# Altium PCB mainpcb.PcbDoc
Units mm, origin at the board's own origin, x right, y up, seen from the top; angles counter-clockwise.
Board outline 49.4 x 49.95 mm, 2 copper layers (Top Layer, Bottom Layer); 81 components, 58 nets, 258 pads, 66 vias.
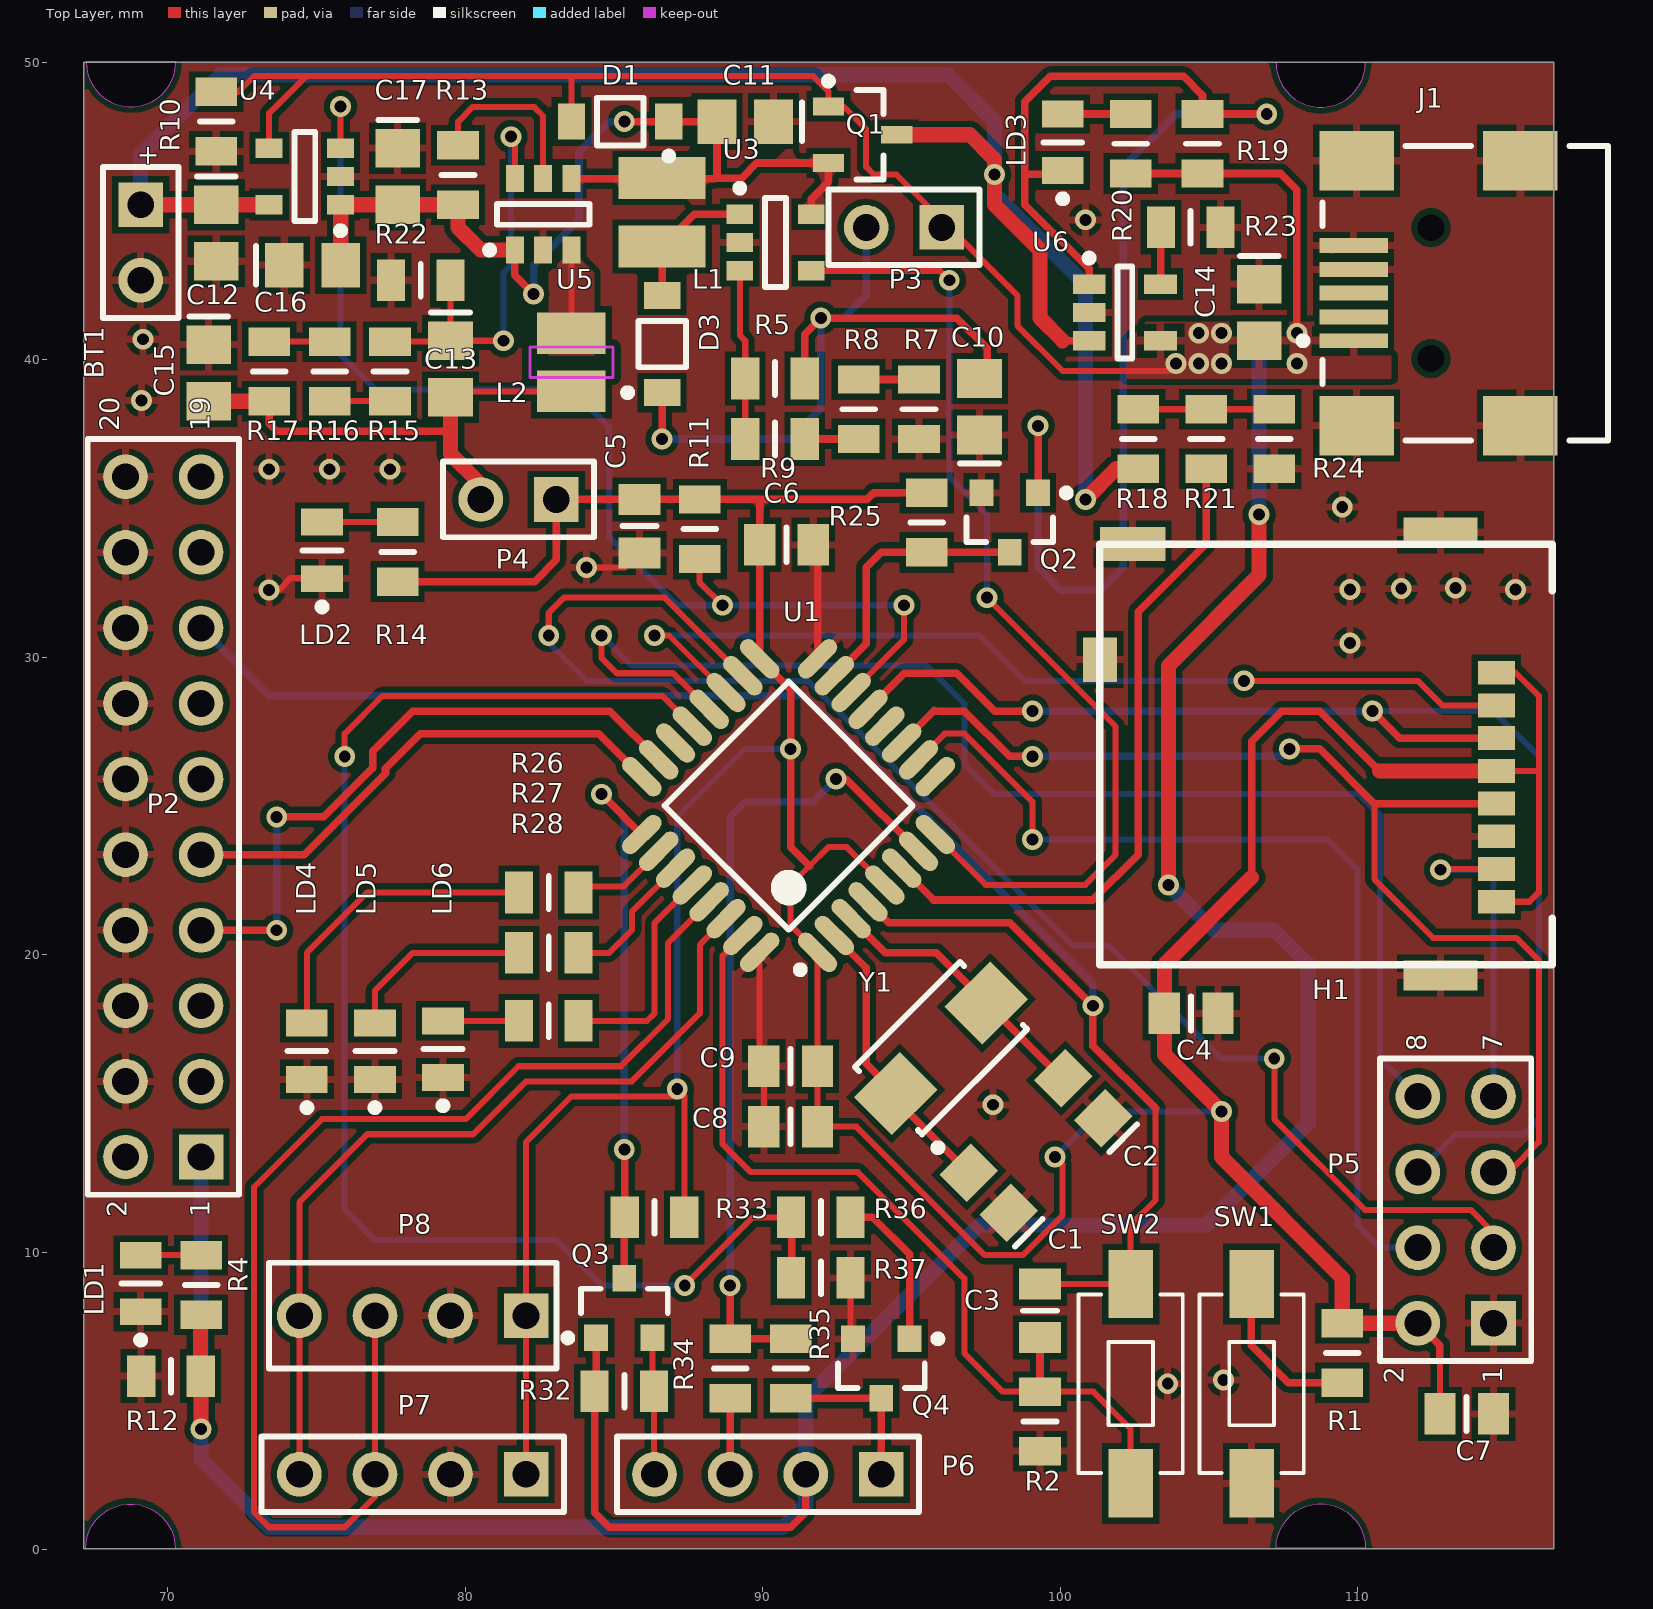
[diagram p0: Top Layer view]
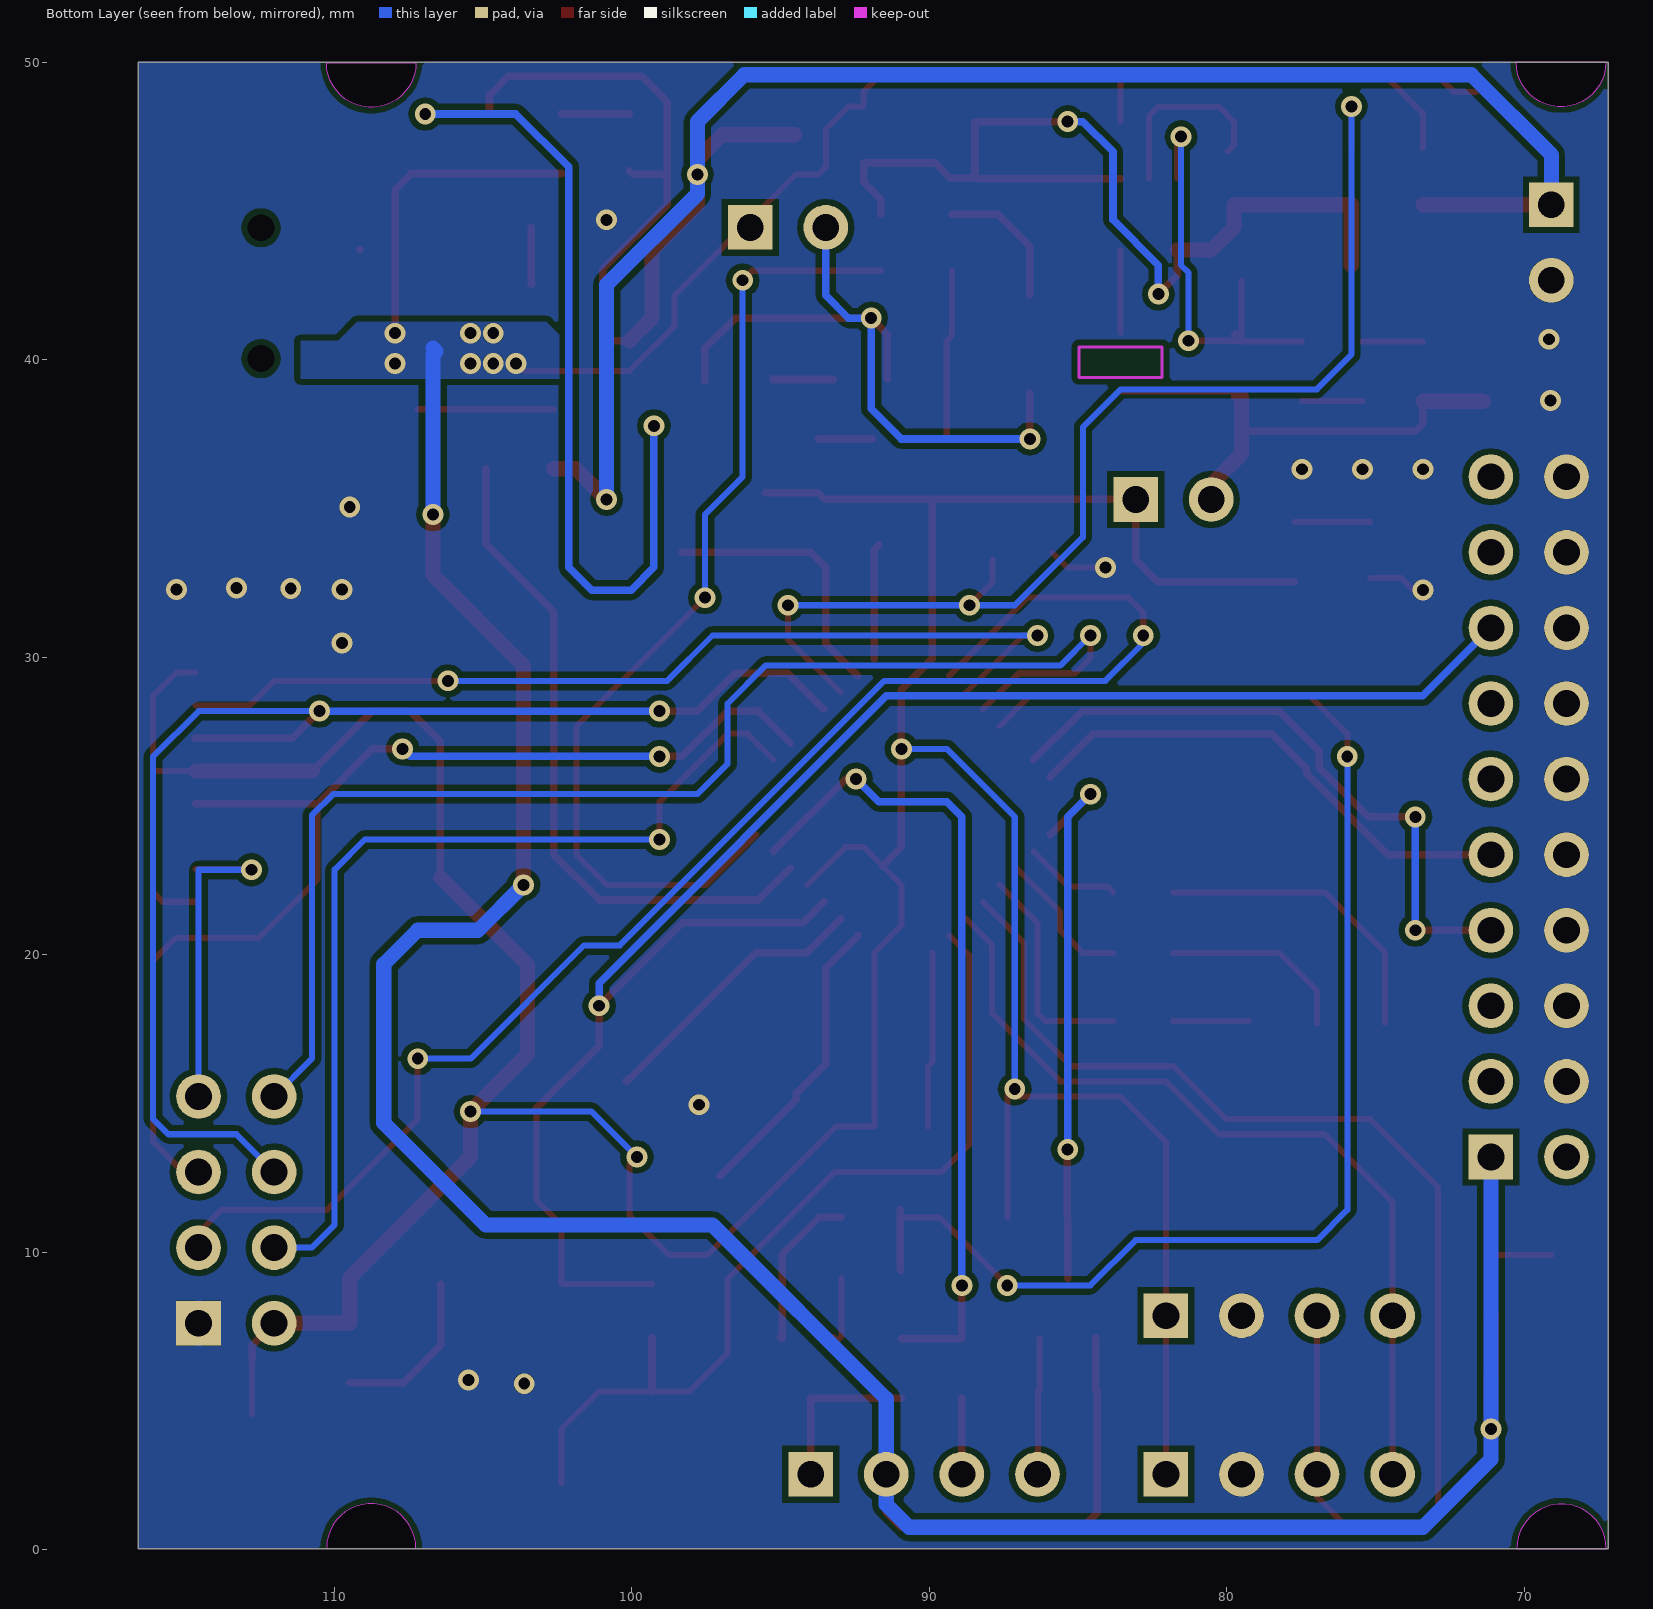
[diagram p1: Bottom Layer view, seen from below]
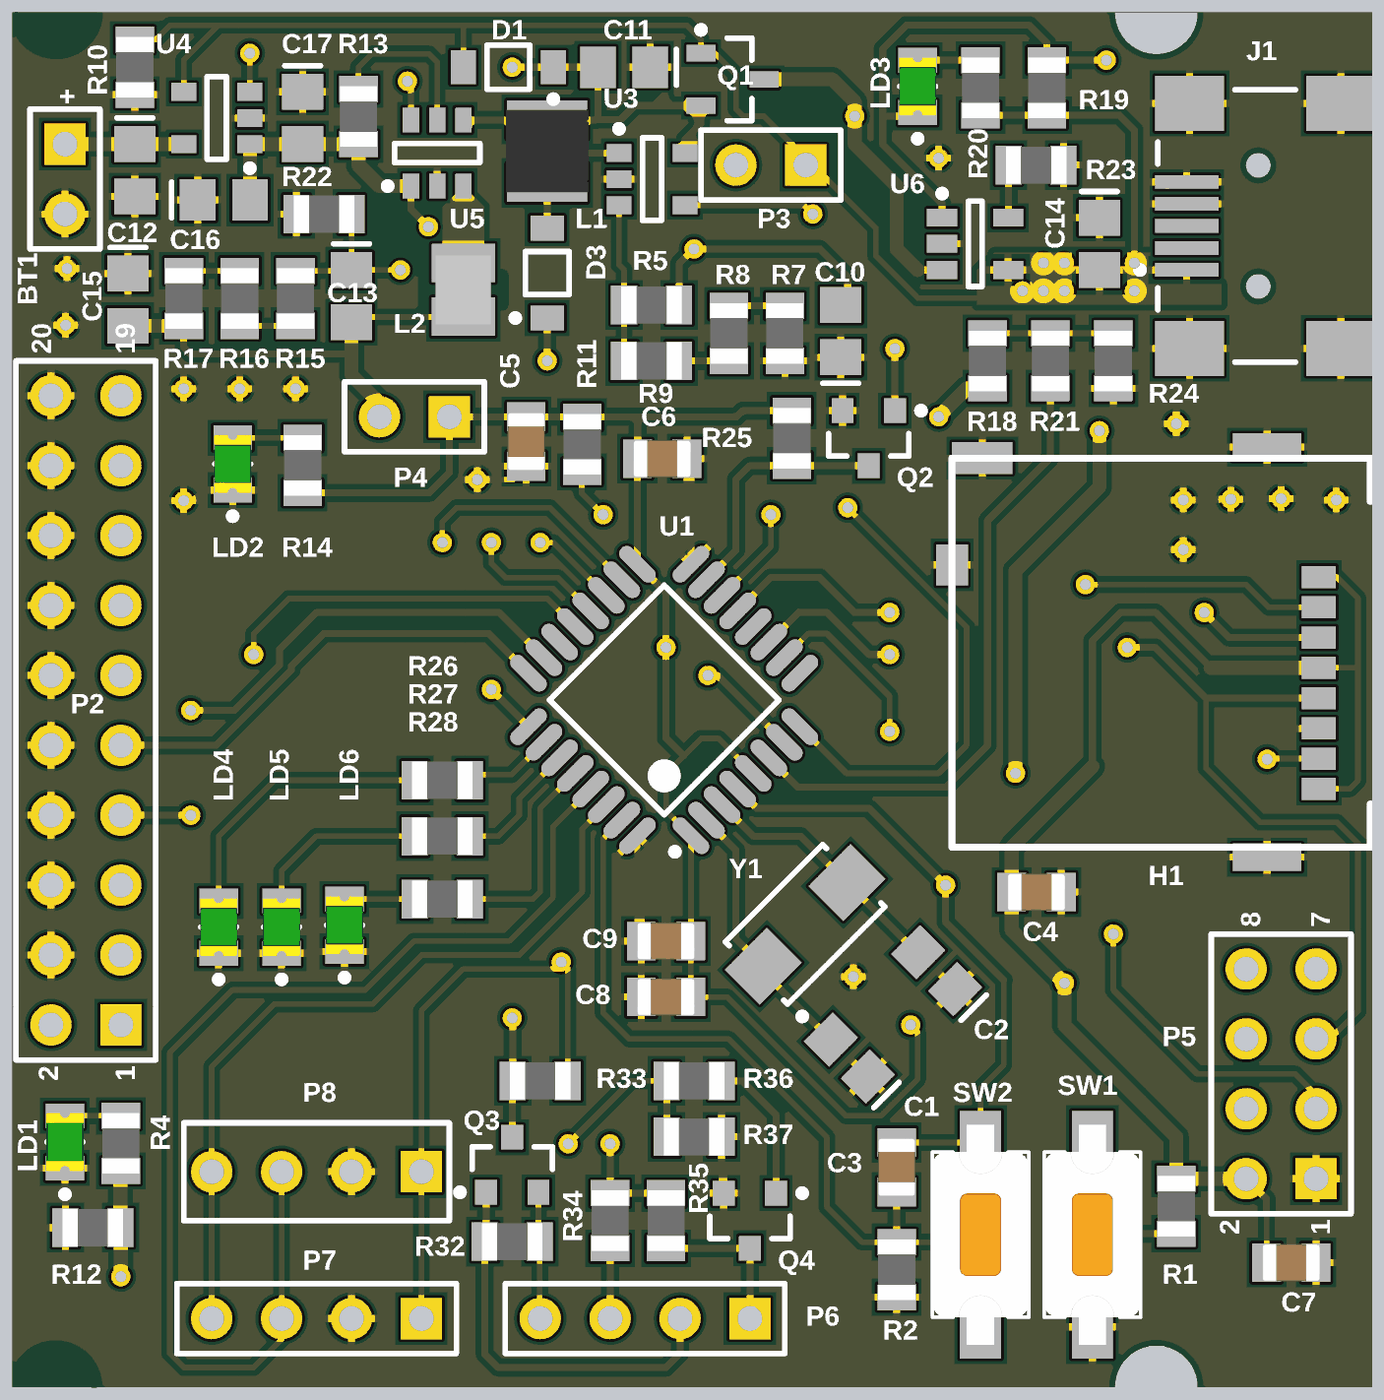
[diagram p2: 3D render of the assembled board from above, using the file's embedded part models]

## Layer stack, top to bottom
Top Solder: solder mask 0.0102, Solder Resist, Dk 3.5
Top Layer: signal copper 0.0356
Dielectric 1: dielectric 0.32, FR-4, Dk 4.8
Bottom Layer: signal copper 0.0356
Bottom Solder: solder mask 0.0102, Solder Resist, Dk 3.5

## Board outline
67.183,0.042 116.586,0.042 116.586,49.996 67.183,49.996
cut-out: 67.262,50.011 ccw(c68.765,50.007) 70.268,50.007 70.264,50.011
cut-out: 107.247,49.989 ccw(c108.75,49.985) 110.253,49.985 110.249,49.989
cut-out: 107.247,0.053 cw(c108.75,0.053) 110.253,0.049
cut-out: 67.242,0.041 cw(c68.745,0.041) 70.248,0.037

## Design rules (kind name [scope] priority, off if disabled: settings)
Clearance Clearance_4 [InNamedPolygon('3V3_L01_P018')] p1: gap=0.203 ignorepadtopadclearanceinfootprint=FALSE
Clearance Clearance_2 [InNamedPolygon('GND_L02_P015')] p2: gap=0.203 ignorepadtopadclearanceinfootprint=FALSE
Clearance Clearance_3 [InNamedPolygon('GND_L01_P013')] p3: gap=0.203 ignorepadtopadclearanceinfootprint=FALSE
Clearance Clearance_1 [InNamedPolygon('+5V_L01_P000')] p4: gap=0.178 ignorepadtopadclearanceinfootprint=FALSE
Clearance [All] p5: gap=0.178 ignorepadtopadclearanceinfootprint=FALSE
ComponentClearance [All] p1: gap=0.025 collisioncheckmode=3 verticalgap=0.254 showdistances=FALSE
MinimumSolderMaskSliver [All] p1: minsoldermaskwidth=0
PolygonConnect PolygonConnect_4 [All vs IsNamedPolygon('GND_L01_P013')] p1: connectstyle=Relief reliefconductorwidth=0.254 reliefentries=4 polygonreliefangle="90 Angle" airgapwidth=0.203
PolygonConnect PolygonConnect_3 [All vs IsNamedPolygon('3V3_L01_P018')] p2: connectstyle=Relief reliefconductorwidth=0.254 reliefentries=4 polygonreliefangle="90 Angle" airgapwidth=0.203
PolygonConnect PolygonConnect_2 [All vs IsNamedPolygon('NETC13_2_L01_P010')] p3: connectstyle=Relief reliefconductorwidth=0.254 reliefentries=4 polygonreliefangle="90 Angle" airgapwidth=0.178
PolygonConnect PolygonConnect_1 [All vs IsNamedPolygon('GND_L01_P006')] p4: connectstyle=Relief reliefconductorwidth=0.254 reliefentries=4 polygonreliefangle="90 Angle" airgapwidth=0.254
PolygonConnect [All vs IsNamedPolygon('VBAT_L01_P003')] p5: thpad.connectstyle=Direct thpad.reliefconductorwidth=0.254 thpad.reliefentries=4 thpad.polygonreliefangle="90 Angle" thpad.airgapwidth=0.254 smdpad.connectstyle=Relief smdpad.reliefconductorwidth=0.178 smdpad.reliefentries=4 smdpad.polygonreliefangle="90 Angle" smdpad.airgapwidth=0.178 via.connectstyle=Relief via.reliefconductorwidth=0.254 via.reliefentries=4 via.polygonreliefangle="90 Angle" via.airgapwidth=0.254
PolygonConnect PolygonConnect_7 [All vs IsNamedPolygon('+5V_L01_P000')] p6: thpad.connectstyle=Direct thpad.reliefconductorwidth=0.254 thpad.reliefentries=4 thpad.polygonreliefangle="90 Angle" thpad.airgapwidth=0.254 smdpad.connectstyle=Relief smdpad.reliefconductorwidth=0.254 smdpad.reliefentries=4 smdpad.polygonreliefangle="90 Angle" smdpad.airgapwidth=0.254 via.connectstyle=Direct via.reliefconductorwidth=0.254 via.reliefentries=4 via.polygonreliefangle="90 Angle" via.airgapwidth=0.254
RoutingVias [All] p1: holewidth=0.711 width=1.27 viastyle="Through Hole" minholewidth=0.711 minwidth=1.27 maxholewidth=0.711 maxwidth=1.27
SilkToSilkClearance [All] p1: silktosilkclearance=0.051
SilkToSolderMaskClearance [IsPad] p1: minsilkscreentomaskgap=0 clearancetoexposedcopper=FALSE
SolderMaskExpansion [All] p1: expansion=0.102
Width [All] p1: maxlimit=1.27 minlimit=0.152 preferedwidth=0.508 minimp=50.000000 maximp=50.000000 favimp=50.000000
26 further rules are at their usual default settings.

## Classes and differential pairs
component class Designator: H1 K1 P5 P6 P7 P8 Q3 Q4 R32 R33 R34 R35 R36 R37

## Components (designator, comment, footprint, x,y, rotation, side; value= is the part's Value field where it differs from the comment)
BT1 "Battery" BAT-2 69.088,43.942 r270 top
C1 "C0805" 0805 97.594,12.007 r135 top value=18pF
C2 "C0805" 0805 100.769,15.182 r135 top value=18pF
C3 "22pF" CAPC2012X135N 99.314,8.038 r90 top
C4 "100nF" CAPC2012X135N 104.394,18.034 r180 top
C5 "100nF" CAPC2012X135N 85.852,34.406 r90 top
C6 "100nF" CAPC2012X135N 90.794,33.782 r180 top
C7 "100nF" CAPC2012X135N 113.654,4.572 r180 top
C8 "100nF" CAPC2012X135N 90.932,14.224 r0 top
C9 "100nF" CAPC2012X135N 90.932,16.256 r0 top
C10 "C0805" 0805 97.282,38.42 r90 top value=10uF
C11 "C0805" 0805 89.408,48.006 r180 top value=10uF
C12 "C0805" 0805 74.864,43.18 r0 top value=10uF
C13 "C0805" 0805 79.502,39.69 r270 top value=22pF
C14 "C0805" 0805 106.68,41.59 r270 top value=10uF
C15 "C0805" 0805 71.374,39.558 r270 top value=10uF
C16 "C0805" 0805 71.628,44.262 r270 top value=10uF
C17 "C0805" 0805 77.724,46.162 r270 top value=10uF
D1 "PMEG2010AEH" ONSC-SOD-123-2-425-04_V 85.201,48.006 r180 top
D3 "PMEG2010AEH" ONSC-SOD-123-2-425-04_V 86.614,40.529 r90 top
H1 "SDKART" PCBComponent_1 102.596,33.804 r270 top
J1 "440478-2" 440478 117.705,42.24 r0 top
L1 "74404032047" "WE-LQS 3015" 86.614,44.958 r270 top
L2 "74438322022" "SMD 2508" 83.566,39.919 r270 top
LD1 "Green" LED_OSRAM_LGR971 69.088,8.956 r90 top
LD2 "Green" LED_OSRAM_LGR971 75.184,33.594 r90 top
LD3 "Green" LED_OSRAM_LGR971 100.076,47.31 r90 top
LD4 "Green" LED_OSRAM_LGR971 74.676,16.764 r90 top
LD5 "Green" LED_OSRAM_LGR971 76.962,16.764 r90 top
LD6 "Green" LED_OSRAM_LGR971 79.248,16.83 r90 top
P2 "Header 10X2" HDR2X10 71.12,13.208 r90 top
P3 "Header 2" HDR1X2 96.012,44.45 r180 top
P4 "Header 2" HDR1X2 83.058,35.306 r180 top
P5 "Header 4X2" HDR2X4 114.554,7.62 r90 top
P6 "Header 4" HDR1X4 93.98,2.54 r180 top
P7 "Header 4" HDR1X4 82.042,2.54 r180 top
P8 "Header 4H" HDR1X4H 82.042,7.874 r180 top
Q1 "BSS308PE" INF-PG-SOT23_N 93.352,47.564 r0 top
Q2 "MMBT3904LT1G" ONSC-SOT-23-3-318-08_V 98.298,34.528 r270 top
Q3 "BC817-25LT1" ONSC-SOT-23-3-318-08_V 85.344,8.128 r90 top
Q4 "BC817-25LT1" ONSC-SOT-23-3-318-08_V 93.98,6.096 r270 top
R1 "1K" RESC2012X60N 109.474,6.62 r90 top
R2 "1K" RESC2012X60N 99.314,4.318 r90 top
R4 "1K" RESC2012X60N 71.12,8.906 r270 top
R5 "100K" RESC2012X60N 90.408,39.37 r180 top
R7 "10K" RESC2012X60N 95.25,38.338 r270 top
R8 "1K" RESC2012X60N 93.218,38.338 r270 top
R9 "100R" RESC2012X60N 90.408,37.338 r0 top
R10 "1K2" RESC2012X60N 71.628,48.006 r90 top
R11 "10K" RESC2012X60N 87.884,34.306 r270 top
R12 "1K2" RESC2012X60N 70.104,5.842 r180 top
R13 "1K2" RESC2012X60N 79.756,46.212 r270 top
R14 "1K" RESC2012X60N 77.724,33.544 r270 top
R15 "RC0805FR-07430KL" RESC2012X60N 77.47,39.608 r90 top value=150K
R16 "150K" RESC2012X60N 75.438,39.608 r90 top
R17 "150K" RESC2012X60N 73.406,39.608 r90 top
R18 "100K" RESC2012X60N 102.616,37.338 r270 top
R19 "1K" RESC2012X60N 104.775,47.26 r270 top
R20 "1K" RESC2012X60N 102.362,47.26 r270 top
R21 "1K" RESC2012X60N 104.902,37.338 r90 top
R22 "100K" RESC2012X60N 78.502,42.672 r180 top
R23 "2K2" RESC2012X60N 104.378,44.45 r0 top
R24 "100K" RESC2012X60N 107.188,37.338 r90 top
R25 "1K" RESC2012X60N 95.504,34.528 r270 top
R26 "1K" RESC2012X60N 82.804,22.098 r0 top
R27 "1K" RESC2012X60N 82.804,20.066 r0 top
R28 "1K" RESC2012X60N 82.804,17.78 r0 top
R32 "4k7" RESC2012X60N 85.344,5.334 r180 top
R33 "4k7" RESC2012X60N 86.36,11.176 r0 top
R34 "4k7" RESC2012X60N 88.9,6.096 r270 top
R35 "4k7" RESC2012X60N 90.932,6.096 r270 top
R36 "4k7" RESC2012X60N 91.948,11.176 r180 top
R37 "4k7" RESC2012X60N 91.948,9.144 r0 top
SW1 "434111043826" 434111043826 106.426,5.588 r90 top
SW2 "434111043826" 434111043826 102.362,5.588 r90 top
U1 "STM32F030K6T6" STM-LQFP32_N 90.865,25.017 r135 top
U3 "MIC2288" TSOT25 90.424,43.942 r0 top
U4 "AP22802" TSOT25 74.606,46.162 r180 top
U5 "AP3401" TSOT26 82.616,44.888 r90 top
U6 "MCP73832T-2DFI/OT" SOT-23-OT5_N 102.165,41.59 r0 top
Y1 "4SMX" 4SMX 95.987,16.866 r45 top

## Footprints (in the part's own frame and the unit in brackets; to place one, negate y for a bottom-side part, rotate by r counter-clockwise, add the part's x,y. Pads: shape width x height; smd on the part's side, far side on the other; paste and mask are expansions set on the pad)
4SMX [mm] "Surface Mount Quartz Crystal; Body 5.2 x 3.4 mm (LxW max)"
  rect 2.159x1.8 smd: 1(-2.15,0) 2(2.15,0)
  silkscreen extent -2.57,-2.42 2.5,1.6
0805 [mm] "Chip Capacitor; Body 2.0 x 1.2 mm (LxW typ)"
  rect 1.3x1.5 smd: 1(-0.95,0) 2(0.95,0)
  silkscreen extent -1.9,-0.65 -1.9,0.65
440478 [mm] "Connector; USB2.0, Type A, SM; 5 Position; Right Angle"
  rect 2.3x0.5 smd: 1(-7.85,-1.6) 2(-7.85,-0.8) 3(-7.85,0) 4(-7.85,0.8) 5(-7.85,1.6)
  rect 2.5x2 smd: 6(-7.75,4.45) 7(-2.25,4.45) 8(-7.75,-4.45) 9(-2.25,-4.45)
  round 0.6 hole 0.9 unplated: MH1(-5.25,2.2) MH2(-5.25,-2.2)
  silkscreen extent -9.67,-4.95 0.7,4.95
434111043826 [mm] "6.0*3.5mm vertical type, SMD, height 4.3mm, white actuator, 260gf, T&R"
  rect 2.3x1.5 smd: 1(-3.35,0) 2(3.35,0)
  silkscreen extent -3,-1.75 3,1.75, body extent -4,-1.75 4,1.75, height 4.3
BAT-2 [mm] "Battery; 2 Leads"
  rect 1.5x1.5 hole 0.9: 1(-1.27,0)
  round 1.5 hole 0.9: 2(1.27,0)
  silkscreen extent -2.54,-1.27 2.54,1.27
CAPC2012X135N [mm] "Chip Capacitor, Body 2.0x1.25mm, IPC Medium Density"
  rect 1.05x1.4 smd: 1(-0.9,0) 2(0.9,0)
  silkscreen extent 0,-0.58 0,0.58, body extent -1.05,-0.67 1.05,0.68, height 1.25
HDR1X2 [mm] "Connector; Header; 2 Position"
  rect 1.5x1.5 hole 0.9: 1(0,0)
  round 1.5 hole 0.9: 2(2.54,0)
  silkscreen extent -1.27,-1.27 3.81,1.27
HDR1X4 [mm] "Connector; Header; 4 Position"
  rect 1.5x1.5 hole 0.9: 1(0,0)
  round 1.5 hole 0.9: 2(2.54,0) 3(5.08,0) 4(7.62,0)
  silkscreen extent -1.27,-1.27 8.89,1.27
HDR1X4H [mm] "Connector; Header; 4 Position; Right Angle"
  rect 1.5x1.5 hole 0.9: 1(0,0)
  round 1.5 hole 0.9: 2(2.54,0) 3(5.08,0) 4(7.62,0)
  silkscreen extent -1.02,-1.78 8.64,1.78
HDR2X4 [mm] "Connector; Header; 4x2 Position"
  rect 1.5x1.5 hole 0.9: 1(0,0)
  round 1.5 hole 0.9: 2(0,2.54) 3(2.54,0) 4(2.54,2.54) 5(5.08,0) 6(5.08,2.54) 7(7.62,0) 8(7.62,2.54)
  silkscreen extent -1.27,-1.27 8.89,3.81
HDR2X10 [mm] "Connector; Header; 10x2 Position"
  rect 1.5x1.5 hole 0.9: 1(0,0)
  round 1.5 hole 0.9: 2(0,2.54) 3(2.54,0) 4(2.54,2.54) 5(5.08,0) 6(5.08,2.54) 7(7.62,0) 8(7.62,2.54) 9(10.16,0) 10(10.16,2.54) 11(12.7,0) 12(12.7,2.54) 13(15.24,0) 14(15.24,2.54) 15(17.78,0) 16(17.78,2.54) 17(20.32,0) 18(20.32,2.54) 19(22.86,0) 20(22.86,2.54)
  silkscreen extent -1.27,-1.27 24.13,3.81
INF-PG-SOT23_N [mm] "SOT23, 3-Leads, Body 2.9x1.3mm, Pitch 0.95mm, IPC Medium Density"
  rect 1.05x0.6 smd: 1(-1.15,0.95) 2(-1.15,-0.95) 3(1.15,0)
  silkscreen extent -1.27,-1.5 0.7,1.92, body extent -0.7,-1.5 0.7,1.5, height 1.1
LED_OSRAM_LGR971 [mm] "Green Chip LED, 2-Leads, Body 2.0x1.25mm, IPC Medium Density"
  rect 0.9x1.4 smd: 1(-0.95,0) 2(0.95,0)
  silkscreen extent -2.02,-0.65 0,0.65, body extent -1.05,-0.67 1.05,0.68, height 0.9
ONSC-SOD-123-2-425-04_V [mm] "SOD, 2-Leads, Body 2.69x1.6mm"
  rect 0.91x1.22 smd: 1(-1.635,0) 2(1.635,0)
  silkscreen extent -1.76,-0.8 0.78,1.28, body extent -1.35,-0.8 1.35,0.8, height 1.35
ONSC-SOT-23-3-318-08_V [mm] "SOT23, 3-Leads, Body 2.92x1.3mm, Pitch 0.95mm"
  rect 0.9x0.8 smd: 1(-1,0.95) 2(-1,-0.95) 3(1,0)
  silkscreen extent -1.12,-1.46 0.65,2.03, body extent -0.65,-1.46 0.65,1.46, height 1.11
PCBComponent_1 [mm]
  rect 0.8x1.24 smd: 1(4.32,12.06) 2(5.42,12.06) 3(6.52,12.06) 4(7.62,12.06) 5(8.72,12.06) 6(9.82,12.06) 7(10.92,12.06) 8(12.02,12.06)
  rect 1x2.5 smd: 6(-0.4,10.18) 6(14.5,10.18)
  rect 1.15x2.2 smd: 6(0,-0.17)
  rect 1.5x1.15 smd: 6(3.88,-1.27)
  silkscreen extent 0,-1.27 14.14,13.93
RESC2012X60N [mm] "Chip Resistor, EIA 0805, Metric 2012, Body 2.0x1.2mm, IPC Medium Density"
  rect 0.95x1.4 smd: 1(-1,0) 2(1,0)
  silkscreen extent 0,-0.55 0,0.55, body extent -1.1,-0.67 1.1,0.68, height 0.6
"SMD 2508" [mm] "Chip Inductor, 2-Leads, Body 2.5x2.0mm, IPC Medium Density"
  rect 1.4x2.3 smd: 1(-0.975,0) 2(0.975,0)
  Keep-Out Layer lines w0.1: 0.508,-1.397 -0.508,-1.397 -0.508,1.397 0.508,1.397 0.508,-1.397
  body extent -1.25,-1 1.25,1, height 0.8
SOT-23-OT5_N [mm] "SOT23, 5-Leads, Body 2.9x1.6mm, Pitch 0.95mm, Lead Span 2.7mm, IPC Medium Density"
  rect 1.1x0.65 smd: 1(-1.2,0.95) 2(-1.2,0) 3(-1.2,-0.95) 4(1.2,-0.95) 5(1.2,0.95)
  silkscreen extent -1.32,-1.55 0.25,1.95, body extent -0.9,-1.55 0.9,1.55, height 1.45
STM-LQFP32_N [mm] "QFP, 32-Leads, Body 7x7mm, Pitch 0.8mm, IPC Medium Density"
  oval 1.65x0.55 smd: 1(-4.175,2.8) 2(-4.175,2) 3(-4.175,1.2) 4(-4.175,0.4) 5(-4.175,-0.4) 6(-4.175,-1.2) 7(-4.175,-2) 8(-4.175,-2.8) 17(4.175,-2.8) 18(4.175,-2) 19(4.175,-1.2) 20(4.175,-0.4) 21(4.175,0.4) 22(4.175,1.2) 23(4.175,2) 24(4.175,2.8)
  oval 0.55x1.65 smd: 9(-2.8,-4.175) 10(-2,-4.175) 11(-1.2,-4.175) 12(-0.4,-4.175) 13(0.4,-4.175) 14(1.2,-4.175) 15(2,-4.175) 16(2.8,-4.175) 25(2.8,4.175) 26(2,4.175) 27(1.2,4.175) 28(0.4,4.175) 29(-0.4,4.175) 30(-1.2,4.175) 31(-2,4.175) 32(-2.8,4.175)
  silkscreen extent -4.3,-2.95 2.95,3.75, body extent -3.5,-3.5 3.5,3.5, height 1.6
TSOT25 [mm]
  rect 0.9x0.65 smd: 1(-1.2,0.95) 2(-1.2,0) 3(-1.2,-0.95) 4(1.2,-0.95) 5(1.2,0.95)
  silkscreen extent -1.32,-1.5 0.35,1.95, body extent -0.85,-1.5 0.85,1.5, height 1.1
TSOT26 [mm]
  rect 0.9x0.6 smd: 1(-1.2,0.95) 2(-1.2,0) 3(-1.2,-0.95) 4(1.2,-0.95) 5(1.2,0) 6(1.2,0.95)
  silkscreen extent -1.32,-1.55 0.35,1.92, body extent -0.9,-1.55 0.9,1.55, height 1.45
"WE-LQS 3015" [mm] "SMD Power Inductor, 2-Leads, Body 3.0x3.0mm"
  rect 1.4x2.921 smd: 1(-1.15,0) 2(1.15,0)
  body extent -1.5,-1.5 1.5,1.5, height 1.5

## Part data
BT1: "Multicell Battery", LatestRevisionDate=17-Jul-2002, LatestRevisionNote="Re-released for DXP Platform.", PackageDescription="Battery; 2 Leads", PackageReference=BAT-2, Published=24-Mar-1999, Publisher="Altium Limited"
C1 C2 C10 C11 C12 C13 C14 C15 C16 C17: "Ceramic Chip Capacitor - Standard", PackageDocument=Mar-2001, Code_IPC=2012[0805], Code_JEITA=0805, ComponentLink1Description="Manufacturer Link", ComponentLink1URL=http://www.kemet.com/, ComponentLink2Description=Datasheet, ComponentLink2URL=http://www.kemet.com/kemet/web/homepage/kechome.nsf/vapubfilesname/F3102TA.pdf/$file/F3102TA.pdf, DatasheetDocument=Mar-2001, LatestRevisionDate=19-Mar-2004, LatestRevisionNote="Silkscreen size reduced.", Note="Footprint corresponds to dimensions for bulk cassette packaging. This case size has tightened tolerances.", PackageReference=0805, Published=17-Jul-2002, Publisher="Altium Limited"
C3: library part CC0805_10NF_50V_10%_X7R, "Non-polarised capacitor", Case=0805, Manufacturer=GENERIC, Manufacturer1 ComponentHeight=1.35mm, Manufacturer1 Example=EPCOS, Manufacturer1 Part Number=B37941K5103K60, Tolerance=±10%, Voltage=50V, Author="CERN DEM JLC", Component Type=Standard, CreateDate=03.12.2007, HelpURL=\\cern.ch\dfs\Applications\Altium\Datasheets\CC0805_X7R_EPCOS.pdf, LatestRevisionDate=03.12.2007, Manufacturer Part Number=CC0805_10NF_50V_10%_X7R, Mounted=Yes, Part Description="SMD Multilayer Chip Ceramic Capacitor", Part Number=CC0805_10NF_50V_10%_X7R, Pin Count=2, SMD=Yes, Socket=No, Status=Preferred, Table="Capacitors SMD", TC=X7R
C4 C5 C6 C7 C8 C9: library part CC0805_1NF_50V_5%_X7R, "Non-polarised capacitor", Case=0805, Manufacturer=GENERIC, Manufacturer1 ComponentHeight=0.94mm, Manufacturer1 Example=AVX, Manufacturer1 Part Number=08055C102JAT2A, Tolerance=±5%, Voltage=50V, Author="CERN DEM JLC", Component Type=Standard, CreateDate=18.01.2011, HelpURL=\\cern.ch\dfs\Applications\Altium\Datasheets\CC0805_X7R_AVX.pdf, LatestRevisionDate=18.01.2011, Manufacturer Part Number=CC0805_1NF_50V_5%_X7R, Mounted=Yes, Part Description="SMD Multilayer Chip Ceramic Capacitor", Part Number=CC0805_1NF_50V_5%_X7R, Pin Count=2, SMD=Yes, Socket=No, Status=None, Table="Capacitors SMD", TC=X7R
D1 D3: library part MMSD914T3G, "Switching Diode, 2-Pin SOD-123, Pb-Free, Tape and Reel", Manufacturer="On Semiconductor", Supplier Part Number 1=MMSD914T3G-ND, ComponentLink1Description="Manufacturer URL", ComponentLink1URL=http://www.onsemi.com/, ComponentLink2Description=Datasheet, ComponentLink2URL=http://www.onsemi.com/pub_link/Collateral/MMSD914T1-D.PDF, ComponentLink3Description="Package Specification", ComponentLink3URL=http://www.onsemi.com/pub_link/Collateral/425-04.PDF, Configuration=Single, DatasheetVersion="Rev. 11", IF Max (A)=0.2, Mounting Technology="Surface Mount", PackageDescription="2-Pin SOD, Body 1.6 x 2.69 mm", PackageReference=SOD-123-2-425-04, PackageVersion="Rev. G, 10/2009", Packing="Tape and Reel", PartNumber=MMSD914T3G, RoHS=TRUE, Supplier 1=Digi-Key, Supplier 2=Newark, Supplier 3=Mouser, Supplier Part Number 2=42K1367, Supplier Part Number 3=863-MMSD914T3G, trr Max (ns)=4
J1: "USB 2.0, Right Angle, SMT, A Type, Receptacle, 5 Position, Black", PackageDocument=15-Nov-2002, ComponentLink1Description="Manufacturer Link", ComponentLink1URL=http://www.tycoelectronics.com/, ComponentLink2Description="Packaging Specification", ComponentLink2URL=http://ecommas.tycoelectronics.com/commerce/DocumentDelivery/DDEController?Action=showdoc&DocId=Customer+Drawing%7F440478%7FB%7Fpdf%7FEnglish%7FC_440478_B.pdf, ContactMaterial="Phosphor Bronze", ContactPlating="Gold (30) over Nickel", DatasheetDocument=15-Nov-2002, DrillSize="Corresponds to nominal value.", HousingMaterial=Thermoplastic, PackageReference=440478, PanelGround=Without, PCB_Layout="Complies with manufacturer's recommendation.", Published=15-Jul-2004, Publisher="Altium Limited"
L1: "WE-LQS SMD Power Inductor, L=4.7 µH", Inductance="4.7 µH", ComponentLink1Description="Manufacturer URL", ComponentLink1URL=http://www.we-online.com, ComponentLink2Description=Datasheet, ComponentLink2URL=http://katalog.we-online.de/pbs/datasheet/74404032047.pdf, PackageReference="WE-LQS 3015", PartNumber=74404032047
L2: "Power Multilayer Inductor WE-MAPI, L=2.2µH", Inductance=2.2µH, ComponentLink1Description="Manufacturer URL", ComponentLink1URL=http://www.we-online.com, ComponentLink2Description=Datasheet, ComponentLink2URL=http://katalog.we-online.de/kataloge/eisos/media/pdf/74438322022.pdf, PackageReference="SMD 2508", PartNumber=74438322022
LD1 LD2 LD3 LD4 LD5 LD6: library part LED_OSRAM_LGR971, "LED Green 1C 2A", Case=0805, Manufacturer=OSRAM, Manufacturer Part Number=LGR971, Author="CERN DEM JLC", Color=Green, ComponentHeight=0.9mm, Component Type=Standard, CreateDate=28.01.2009, HelpURL=\\cern.ch\dfs\Applications\Altium\Datasheets\LED_OSRAM_LGR971.pdf, LatestRevisionDate=17.03.2010, Mounted=Yes, PackageDescription="Green Chip LED, 2-Leads, Body 2.0x1.25mm, IPC Medium Density", Part Description="Surface Mount Green LED (0805 Case)", Part Number=LED_OSRAM_LGR971, Pin Count=2, SMD=Yes, Socket=No, Table="LEDs & Displays"
P2: "Header, 10-Pin, Dual row", LatestRevisionDate=17-Jul-2002, LatestRevisionNote="Re-released for DXP Platform.", Publisher="Altium Limited"
P3 P4: "Header, 2-Pin", LatestRevisionDate=17-Jul-2002, LatestRevisionNote="Re-released for DXP Platform.", Publisher="Altium Limited"
P5: "Header, 4-Pin, Dual row", LatestRevisionDate=17-Jul-2002, LatestRevisionNote="Re-released for DXP Platform.", Publisher="Altium Limited"
P6 P7: "Header, 4-Pin", LatestRevisionDate=17-Jul-2002, LatestRevisionNote="Re-released for DXP Platform.", Publisher="Altium Limited"
P8: "Header, 4-Pin, Right Angle", LatestRevisionDate=17-Jul-2002, LatestRevisionNote="Re-released for DXP Platform.", Publisher="Altium Limited"
Q1: "P-Channel OptiMOS P3 Small-Signal-Transistor, -30 V VDS, -2 A ID, -55 to 150 degC, PG-SOT23, Reel, Green", Manufacturer=Infineon, ComponentLink1Description="Manufacturer URL", ComponentLink1URL=http://www.infineon.com/, ComponentLink2Description=Datasheet, ComponentLink2URL=http://www.infineon.com/dgdl/BSS308PE_Rev23_.pdf?folderId=db3a304314dca38901154a72e3951a65&fileId=db3a304330f686060131099c80400073, ComponentLink3Description="Package Specification", ComponentLink3URL=http://www.infineon.com/dgdl/SOT23-Package_Overview.pdf?folderId=db3a30431936bc4b0119532290053c66&fileId=db3a30431936bc4b0119533468123c85, DatasheetVersion="Rev. 2.03", Green=TRUE, Halogen-free=TRUE, ID (max)="-2 A", IDpuls (max)="-8 A", Mounting Technology="Surface Mount", PackageDescription="3-Pin Small Outline Transistor Package, 2.9 x 1.3 mm Body, 0.95 mm Pitch", PackageReference=PG-SOT23, PackageVersion=Apr-08, Packing=Reel, PartNumber=BSS308PE, Pto t (max)="0.5 W", QG="-5 nC", RDS (on) (max)="80 mOhm", RDS (on) (max) (@4.5V)="130 mOhm", Rth="250 K/W", VDS (max)="-30 V", VGS(th) (max)="-1 V", VGS(th) (min)="-2 V"
Q2: "General Purpose Transistor, NPN Silicon, 3-Pin SOT-23, Pb-Free, Tape and Reel", Manufacturer="On Semiconductor", Supplier Part Number 1=MMBT3904LT1GOSTR-ND, Supplier Part Number 10=863-MMBT3904LT1G, ComponentLink1Description="Manufacturer URL", ComponentLink1URL=http://www.onsemi.com/, ComponentLink2Description=Datasheet, ComponentLink2URL=http://www.onsemi.cn/pub_link/Collateral/MMBT3904LT1-D.PDF, ComponentLink3Description="Package Specification", ComponentLink3URL=http://www.onsemi.cn/pub_link/Collateral/318-08.PDF, DatasheetVersion="Rev. 12", fT Min (MHz)=300, IC Continuous (A)=0.2, Mounting Technology="Surface Mount", PackageDescription="3-Pin Small Outline Transistor, Body 2.92 x 1.3 mm, Pitch 0.95 mm", PackageReference=SOT-23-3-318-08, PackageVersion="Rev. AP, 11/2009", Packing="Tape and Reel", PartNumber=MMBT3904LT1G, Polarity=NPN, RoHS=TRUE, Supplier 1=Digi-Key, Supplier 2=Digi-Key, Supplier 3=Digi-Key, Supplier 4=Farnell, Supplier 5=Farnell, Supplier 6=Farnell, Supplier 7=Newark, Supplier 8=Newark, Supplier 9=Newark, Supplier 10=Mouser, Supplier Part Number 2=MMBT3904LT1GOSCT-ND, Supplier Part Number 3=MMBT3904LT1GOSDKR-ND, Supplier Part Number 4=2317804, Supplier Part Number 5=1459100, Supplier Part Number 6=1459100RL, Supplier Part Number 7=83K0942, Supplier Part Number 8=83H7337, Supplier Part Number 9=28X7922
Q3 Q4: "General Purpose Transistor, NPN Silicon, 3-Pin SOT-23, Tape and Reel", Manufacturer="On Semiconductor", Supplier Part Number 1=BC817-25LT1OSCT-ND, ComponentLink1Description="Manufacturer URL", ComponentLink1URL=http://www.onsemi.com/, ComponentLink2Description=Datasheet, ComponentLink2URL=http://www.onsemi.com/pub_link/Collateral/BC817-16LT1-D.PDF, ComponentLink3Description="Package Specification", ComponentLink3URL=http://www.onsemi.cn/pub_link/Collateral/318-08.PDF, DatasheetVersion="Rev. 12", fT Min (MHz)=100, IC Continuous (A)=0.5, Mounting Technology="Surface Mount", PackageDescription="3-Pin Small Outline Transistor, Body 2.92 x 1.3 mm, Pitch 0.95 mm", PackageReference=SOT-23-3-318-08, PackageVersion="Rev. AP, 11/2009", Packing="Tape and Reel", PartNumber=BC817-25LT1, Polarity=NPN, RoHS=FALSE, Supplier 1=Digi-Key
R1 R2 R4 R5 R7 R8 R9 R10 R11 R12 R13 R14 R15 R16 R17 R18 R19 R20 R21 R22 R23 R24 R25 R26 R27 R28 R32 R33 R34 R35 R36 R37: library part R0805_1K1_0.1%_0.1W_10PPM, "Resistor - 0.1%", Case=0805, Manufacturer=GENERIC, Manufacturer1 ComponentHeight=0.6mm, Manufacturer1 Example="TYCO HOLSWORTHY", Manufacturer1 Part Number=RN73C2A1K1BTG, Power=0.1W, Tolerance=±0.1%, Author="CERN DEM JLC", Component Type=Standard, CreateDate=03.12.2007, HelpURL=\\cern.ch\dfs\Applications\Altium\Datasheets\R0805_Tyco_RN73.pdf, LatestRevisionDate=13.03.2008, Manufacturer Part Number=R0805_1K1_0.1%_0.1W_10PPM, Mounted=Yes, Part Description="Thin Film Chip Resistor", Part Number=R0805_1K1_0.1%_0.1W_10PPM, Pin Count=2, SMD=Yes, Socket=No, Status="Not recommended", Table="Resistors SMD", TC=±10ppm
SW1 SW2: "WS-TASV SMD Tact Switch 6.0X3.5 mm", ComponentLink1Description="Manufacturer URL", ComponentLink1URL=http://www.we-online.com, ComponentLink2Description=Datasheet, ComponentLink2URL=http://katalog.we-online.de/em/datasheet/434111043826.pdf, NoPins=02, PackageReference=434111043826, PartNumber=434111043826
U1: "ARM Cortex-M0 32-bit MCU, 32 KB Flash, 4 KB Internal RAM, 26 I/Os, 32-pin LQFP, -40 to 85 degC, Tray", I/Os (High Current)=26, Operating Frequency(F) (Processor speed) (MHz)=48, Supplier Part Number 1=497-14046-ND, Supply Voltage(Vcc) min (V)=2.4, ComponentLink1Description="Manufacturer URL", ComponentLink1URL=http://www.st.com/web/en/home.html, ComponentLink2Description=Datasheet, ComponentLink2URL=http://www.st.com/st-web-ui/static/active/en/resource/technical/document/datasheet/DM00088500.pdf, ComponentLink3Description="Package Specification", ComponentLink3URL=http://www.st.com/st-web-ui/static/active/en/resource/technical/document/datasheet/DM00088500.pdf, Core="ARM Cortex-M0", DatasheetVersion="Rev. 1", FLASH Size (Prog) (kB)=32, Internal RAM Size (kB)=4, Mounting Technology="Surface Mount", PackageDescription="32-Pin Low Profile Quad Flat Package, 7 x 7 mm Body, 0.8 mm Pitch", PackageReference=LQFP32, PackageVersion="Rev. 1, 07/2013", Packing=Tray, PartNumber=STM32F030K6T6, Supplier 1=Digi-Key, Supplier 2=Newark, Supplier 3=Mouser, Supplier Part Number 2=19X6194, Supplier Part Number 3=511-STM32F030K6T6
U6: "Miniature Single-Cell, Fully Integrated Li-Ion, Li-Polymer Charge Management Controller, 4.2V, 5-Pin SOT-23, Industrial Temperature, Tape and Reel", Manufacturer=Microchip, Supplier Part Number 1=MCP73832T-2DFI/OTTR-ND, Code_IPC=SOT23-5, ComponentLink1Description="Manufacturer URL", ComponentLink1URL=http://www.microchip.com/, ComponentLink2Description=Datasheet, ComponentLink2URL=http://ww1.microchip.com/downloads/en/DeviceDoc/21984e.pdf, ComponentLink3Description="Package Specification", ComponentLink3URL=http://www.microchip.com/stellent/groups/techpub_sg/documents/packagingspec/en012702.pdf, DatasheetVersion="revE, Sep-2008", Mounting Technology="Surface Mount", PackageDescription="5-Lead Plastic Small Outline Transistor (OT) [SOT-23]", PackageReference=SOT-23-OT5, PackageVersion="revBB, Aug-2009", PartNumber=MCP73832T-2DFI/OT, Supplier 1=Digi-Key, Supplier 2=Digi-Key, Supplier 3=Digi-Key, Supplier 4=Newark, Supplier 5=Mouser, Supplier Part Number 2=MCP73832T-2DFI/OTCT-ND, Supplier Part Number 3=MCP73832T-2DFI/OTDKR-ND, Supplier Part Number 4=08R1849, Supplier Part Number 5=579-MCP73832T2DFI/OT
Y1: "Surface Mount Quartz Crystal", PackageDocument=9-Sep-1999, ComponentLink1Description="Manufacturer Link", ComponentLink1URL=http://www.cmac.com/mt/, DatasheetDocument=9-Sep-1999, Note="PCB layout complies with manufacturer's recommendation.", PackageReference=4SMX, Published=17-Jul-2002, Publisher="Altium Limited"

## Via types
v1: diameter 0.7, hole 0.4, Top Layer to Bottom Layer, 66 vias

## Nets (pads, with @x,y where several pads share a name; then routed paths per layer and width w, separated by ;. In a path a pad name is that pad's centre, name@x,y a point inside that pad or via, vN(x,y) a via of type N, cw(c..) or ccw(c..) an arc to the next point about the centre after c; other vN are vias at no path point)
3V3: C4.2 C5.2 C6.2 C7.2 C8.2 C9.2 H1.1 H1.4 H1.8 P4.1 P5.2 P7.1 P8.1 R1.2 R11.1 R14.2 R25.1 R33.2 U1.1 U1.5 U1.17 | length 150.2
  Top Layer w0.203: P7.1 P8.1 82.042,13.716 83.566,15.24 87.122,15.24 v1(87.122,15.494) 87.36,15.256 R33.2 ; U1.5 92.825,23.622 92.202,23.622 91.567,22.987 90.932,22.352 90.932,20.99 U1.1 91.837,16.261 C9.2 C8.2 93.143,14.224 97.461,9.906 98.731,9.906 100.076,11.251 100.076,12.954 v1(99.822,13.208) ; C7.2 112.754,6.372 ; H1.8 115.764,21.784 116.078,22.098 116.078,26.162 ; H1.4 116.056,26.184 116.078,26.162 ; H1.1 115.296,29.484 116.078,28.702 116.078,26.162
  Top Layer w0.254: R14.2 82.328,32.544 83.058,33.274 P4.1 C5.2 R11.1 89.9,35.306 ; 91.567,22.987 90.932,23.622 v1(90.932,26.924) 90.932,28.909 U1.17 C6.2 C6.2 89.9,33.788 89.9,35.306 ; R25.1 93.726,35.528 93.504,35.306 89.9,35.306 ; 106.426,22.606 106.426,27.178 107.442,28.194 108.712,28.194 110.722,26.184 ; P5.2 112.754,6.88 112.754,6.372
  Top Layer w0.508: 106.426,22.606 103.494,19.674 C4.2 103.494,16.648 v1(105.41,14.732) 105.41,13.208 109.474,9.144 R1.2 P5.2 ; 110.722,26.184 H1.4
  Bottom Layer w0.203: v1(87.122,15.494) 87.122,24.638 89.408,26.924 v1(90.932,26.924) ; v1(99.822,13.208) 101.346,14.732 v1(105.41,14.732)
+5V: C14.2 D1.2 J1.1 P2.1 P3.1 P6.2 Q1.1 Q3.1 R4.2 R10.2 R12.1 R19.2 R20.2 R32.2 U4.4 U6.4 | length 158.5
  Top Layer w0.203: R10.2 72.374,49.006 72.898,49.53 74.651,49.53 ; U4.4 73.406,48.285 74.651,49.53 ; D1.2 83.566,49.53 ; v1(103.886,39.878) 103.632,39.624 100.076,39.624 98.552,41.148 98.552,42.164 94.488,46.228 93.726,46.228 93.472,46.482 93.472,47.752 92.71,48.514 Q1.1 92.202,49.022 91.694,49.53 83.566,49.53 ; 74.651,49.53 83.566,49.53
  Top Layer w0.254: Q3.1 84.394,5.384 R32.2 84.344,1.254 84.836,0.762 90.932,0.762 91.44,1.27 P6.2 ; R20.2 R19.2 107.41,46.26 107.95,45.72 v1(107.95,40.894)
  Top Layer w0.508: v1(71.12,4.064) 71.12,5.826 R12.1 71.104,7.89 R4.2 ; v1(103.632,22.352) 103.632,29.718 106.68,32.766 v1(106.68,34.798)
  Bottom Layer w0.508: P2.1 v1(71.12,4.064) 71.12,3.048 73.406,0.762 90.678,0.762 91.44,1.524 P6.2 91.44,5.08 97.282,10.922 104.902,10.922 108.331,14.351 108.331,19.685 107.188,20.828 105.156,20.828 v1(103.632,22.352) ; v1(106.68,34.798) 106.68,40.167 106.57,40.276 106.68,40.386
  other v1: 104.648,39.878 105.41,39.878 107.95,39.878 104.648,40.894 105.41,40.894
CLK: H1.5 P5.5 U1.11 | length 39.2
  Top Layer w0.203: 110.552,25.084 110.552,22.544 112.522,20.574 115.316,20.574 116.078,19.812 116.078,13.716 115.062,12.7 P5.5
  Top Layer w0.254: U1.11 95.758,28.213 95.777,28.194 96.774,28.194 98.298,26.67 v1(99.06,26.67) ; v1(107.696,26.924) 108.712,26.924 110.552,25.084 H1.5
  Bottom Layer w0.254: v1(99.06,26.67) 107.442,26.67 v1(107.696,26.924)
En_5v: U1.8 U3.4 | length 33.6
  Top Layer w0.203: U3.4 95.946,42.992 v1(96.266,42.672) ; U1.8 97.489,22.352 100.838,22.352 101.854,23.368 101.854,27.676 v1@97.536,31.994
  Bottom Layer w0.203: v1(96.266,42.672) 96.266,36.068 97.536,34.798 v1(97.536,32.004)
EXT_BUTON: R1.1 SW1.2 | length 5.7
  Top Layer w0.203: SW1.2@106.41,8.922 SW1.2
  Top Layer w0.254: SW1.2@106.41,8.922 106.41,6.874 107.664,5.62 R1.1
GND: BT1.2 C1.1 C2.1 C4.1 C5.1 C6.1 C7.1 C8.1 C9.1 C10.1 C11.1 C12.1 C14.1 C15.1 C16.2 C17.1 H1.6 J1.4 J1.5 J1.6 J1.7 J1.8 J1.9 LD1.1 LD2.1 LD4.1 LD5.1 LD6.1 P2.4 P2.6 P2.8 P2.10 P2.12 P2.14 P2.16 P2.18 P2.20 P5.1 P7.2 P8.2 Q2.2 Q4.2 R2.1 R7.2 R10.1 R12.2 R22.2 R23.2 R24.1 R37.2 SW1.1 U1.16 U1.32 U3.2 U4.2 U5.2 U6.2 | length 15.9
  Top Layer w0.203: v1(73.406,32.258) 73.727,32.258 74.136,32.668 75.16,32.668 LD2.1 ; v1(84.074,33.02) 85.366,33.02 C5.1 ; U1.32 89.893,16.395 C9.1 C8.1 ; R37.2 92.948,7.178 Q4.2 ; Q4.2@93.218,7.162 Q4.2@93.284,7.096
  Top Layer w0.254: C6.1 91.837,33.639 U1.16 ; J1.5@109.133,43.703 J1.5@109.144,43.703
  other v1: 103.607,5.588 105.486,5.715 97.739,14.961 109.728,30.48 109.728,32.283 115.291,32.283 111.455,32.309 113.284,32.334 109.474,35.052 73.406,36.322 75.438,36.322 77.47,36.322 69.113,38.633 69.164,40.691 100.838,44.704
HFXTAL_N: C2.2 U1.3 Y1.2 | length 9.4
  Top Layer w0.254: U1.3 94.119,20.066 95.827,20.066 Y1.2 100.039,15.854 C2.2 ; C2.2@100.145,15.748 C2.2@100.203,15.748
HFXTAL_P: C1.2 U1.2 Y1.1 | length 10
  Top Layer w0.254: U1.2 92.403,20.627 93.472,19.558 93.472,16.34 Y1.1 94.466,15.135 C1.2 C1.2@97.028,12.573
IRQ: P5.8 U1.20 | length 44.9
  Top Layer w0.203: v1(84.582,30.734) 84.582,29.972 85.09,29.464 86.983,29.464 U1.20
  Bottom Layer w0.203: v1(84.582,30.734) 85.598,29.718 95.504,29.718 96.774,28.448 96.774,26.416 97.79,25.4 110.033,25.4 110.744,24.689 110.744,16.51 P5.8
MISO: H1.7 P5.7 | length 11.3
  Top Layer w0.203: v1(112.776,22.86) 112.8,22.884 H1.7
  Bottom Layer w0.203: v1(112.776,22.86) 114.554,22.86 P5.7
MOSI: H1.3 P5.6 U1.13 | length 45.7
  Top Layer w0.254: U1.13 94.747,29.464 96.52,29.464 97.79,28.194 v1(99.06,28.194) ; v1(110.49,28.194) 111.4,27.284 H1.3
  Bottom Layer w0.203: v1(110.49,28.194) 114.554,28.194 116.078,26.67 116.078,14.478 115.57,13.97 113.284,13.97 P5.6
  Bottom Layer w0.254: v1(99.06,28.194) v1(110.49,28.194)
NetC3_1: C3.1 R2.2 SW2.1 U1.31 | length 30.1
  Top Layer w0.203: U1.31 88.646,19.969 88.646,13.641 89.587,12.7 93.193,12.7 96.774,9.119 96.774,6.604 98.06,5.318 R2.2 101.108,5.318 102.362,4.064 SW2.1
  Top Layer w0.254: R2.2 C3.1
NetC10_2: C10.2 D3.1 P3.2 R5.1 | length 24.1
  Top Layer w0.254: v1(86.614,37.338) D3.1 ; R5.1 91.408,40.862 v1(91.948,41.402) 96.52,41.402 97.536,40.386 C10.2@97.536,39.304
  Bottom Layer w0.254: v1(86.614,37.338) 90.932,37.338 91.948,38.354 v1(91.948,41.402) 92.71,41.402 93.472,42.164 P3.2 P3.2@93.472,44.704
NetC13_1: C13.1 R15.2 R22.1 U5.6 | length 14.4
  Top Layer w0.203: R15.2 79.47,40.608 C13.1 ; R22.1 C13.1 ; C13.1@79.69,40.894 C13.1@79.756,40.828 ; v1(81.28,40.64) C13.1 ; v1(81.534,47.498) 81.666,47.366 U5.6
  Bottom Layer w0.203: v1(81.28,40.64) 81.28,42.926 81.534,43.18 v1(81.534,47.498)
NetC13_2: C13.2 C15.2 L2.2 P4.2 R17.1 | length 16.9
  Top Layer w0.203: C13.2@79.756,38.74 79.756,38.928 83.55,38.928 L2.2
  Top Layer w0.254: R17.1 73.406,37.846 73.66,37.592 79.502,37.592
  Top Layer w0.508: C15.2 R17.1 ; C13.2 79.502,37.592 79.502,36.83 80.518,35.814 P4.2
NetD3_2: D3.2 L1.2 U3.1 | length 4.7
  Top Layer w0.254: D3.2 L1.2 87.698,44.892 U3.1
NetL2_1: L2.1 U5.3 | length 2.8
  Top Layer w0.203: L2.1 U5.3
NetLD1_2: LD1.2 R4.1 | length 2
  Top Layer w0.203: LD1.2 R4.1
NetLD2_2: LD2.2 R14.1 | length 2.5
  Top Layer w0.203: LD2.2 R14.1
NetLD3_1: LD3.1 Q2.1 R19.1 U6.1 | length 47.3
  Top Layer w0.254: Q2.1 v1(99.248,37.78) ; LD3.1 99.944,46.228 98.806,46.228 ; U6.1 100.965,43.053 98.806,45.212 98.806,46.228 ; v1(106.934,48.26) R19.1 104.775,48.895 104.14,49.53 99.657,49.53 98.806,48.679 98.806,46.228
  Bottom Layer w0.254: v1(99.248,37.78) 99.248,33.02 100.01,32.258 101.346,32.258 102.108,33.02 102.108,46.482 103.886,48.26 v1(106.934,48.26)
NetLD3_2: LD3.2 R20.1 | length 2.3
  Top Layer w0.254: LD3.2 R20.1
NetLD4_2: LD4.2 R26.1 | length 10.3
  Top Layer w0.203: LD4.2 74.676,20.066 76.708,22.098 R26.1
NetLD5_2: LD5.2 R27.1 | length 6.5
  Top Layer w0.203: LD5.2 76.962,18.796 78.232,20.066 R27.1
NetLD6_2: LD6.2 R28.1 | length 2.6
  Top Layer w0.203: LD6.2 R28.1
NetP6_1: P6.1 Q4.3 R35.2 | length 5.6
  Top Layer w0.254: R35.2 Q4.3 P6.1
NetP6_3: P6.3 R34.2 | length 2.6
  Top Layer w0.254: P6.3 R34.2
NetP6_4: P6.4 Q3.2 R32.1 | length 4.6
  Top Layer w0.203: Q3.2 86.294,5.384 R32.1 86.344,2.556 P6.4
NetQ2_3: Q2.3 R25.2 U1.15 | length 9.1
  Top Layer w0.254: U1.15 93.472,30.452 93.472,33.02 93.98,33.528 R25.2 Q2.3
NetQ3_3: Q3.3 R33.1 U1.25 | length 18.5
  Top Layer w0.254: v1(84.582,25.4) 84.582,25.395 U1.25 ; Q3.3 85.344,11.16 R33.1 85.36,13.446 v1(85.344,13.462)
  Bottom Layer w0.254: v1(84.582,25.4) 85.344,24.638 v1(85.344,13.462)
NetQ4_1: Q4.1 R36.1 | length 5.4
  Top Layer w0.254: R36.1 93.685,11.176 94.93,9.931 Q4.1 Q4.1@94.996,7.162
NetR3_1: 
NetR5_2: R5.2 R9.1 U3.3 | length 5.7
  Top Layer w0.203: U3.3 89.224,40.824 89.408,40.64 R5.2 R9.1
NetR7_1: R7.1 R8.1 | length 2
  Top Layer w0.254: R8.1 95.234,39.338 R7.1@95.25,39.354
NetR8_2: R8.2 R9.2 | length 1.8
  Top Layer w0.254: 91.916,37.338 R8.2 R8.2@93.726,37.338
NetR11_2: R11.2 U1.14 U4.3 | length 39.9
  Top Layer w0.203: U4.3 v1(75.806,48.514) ; R11.2@87.868,33.29 87.868,32.528 v1(88.646,31.75) ; U1.14 94.742,30.591 v1(94.742,31.75)
  Bottom Layer w0.203: v1(75.806,48.514) 75.806,40.17 76.971,39.005 83.566,39.005 84.836,37.735 84.836,34.036 87.122,31.75 v1(88.646,31.75) 94.71,31.75 94.726,31.766 v1(94.742,31.75)
NetR13_1: R13.1 U5.5 | length 6.4
  Top Layer w0.203: R13.1@79.953,47.015 R13.1 79.756,48.006 80.239,48.489 82.321,48.489 82.616,48.194 U5.5
NetR15_1: R15.1 R16.1 | length 2
  Top Layer w0.203: R16.1 R15.1
NetR16_2: R16.2 R17.2 | length 2
  Top Layer w0.203: R17.2 R16.2
NetR18_1: R18.1 R21.2 R24.2 | length 4.6
  Top Layer w0.203: R18.1 R21.2 R24.2
NetR21_1: R21.1 U1.6 | length 22.9
  Top Layer w0.254: U1.6 95.735,21.844 101.092,21.844 102.616,23.368 102.616,31.535 104.902,33.821 R21.1
NetR23_1: R23.1 U6.5 | length 1.9
  Top Layer w0.254: U6.5 103.378,42.553 R23.1
NetR26_2: R26.2 U1.26 | length 3.3
  Top Layer w0.203: R26.2 84.007,22.301 85.321,22.301 U1.26
NetR27_2: R27.2 U1.27 | length 4.8
  Top Layer w0.203: R27.2 84.836,20.066 85.598,20.828 85.598,21.447 U1.27
NetR28_2: R28.2 U1.28 | length 7.5
  Top Layer w0.203: R28.2 86.106,17.78 86.36,18.034 86.36,21.077 U1.28
NetR34_1: R34.1 R35.1 U1.7 | length 27.4
  Top Layer w0.254: v1(88.9,8.89) R34.1 R35.1 ; v1(92.456,25.908) 92.802,25.908 U1.7
  Bottom Layer w0.254: v1(88.9,8.89) 88.9,24.638 89.408,25.146 91.694,25.146 v1(92.456,25.908)
NetR36_2: R36.2 R37.1 U1.21 | length 47.7
  Top Layer w0.203: v1(75.946,26.67) 75.946,27.432 77.216,28.702 86.614,28.702 U1.21 ; v1(87.376,8.89) 89.662,11.176 R36.2
  Top Layer w0.254: R37.1@90.948,9.398 90.964,9.414 R36.2@90.964,11.43
  Bottom Layer w0.203: v1(75.946,26.67) 75.946,11.43 76.962,10.414 83.058,10.414 84.582,8.89 v1(87.376,8.89)
NetU1_9: U1.9
NetU1_22: U1.22
Reset: C3.2 P2.15 SW2.2 U1.4 | length 58.3
  Top Layer w0.203: C3.2 SW2.2 102.362,10.922 103.202,11.762 103.202,14.841
  Top Layer w0.254: U1.4 94.234,21.082 98.298,21.082 v1(101.092,18.288) 101.092,16.951 103.202,14.841
  Bottom Layer w0.254: P2.15 73.406,28.702 91.44,28.702 101.092,19.05 v1(101.092,18.288)
RF_CE: P5.3 U1.18 | length 50.5
  Top Layer w0.203: v1(82.804,30.734) 82.804,31.496 83.312,32.004 86.706,32.004 U1.18 ; v1(107.188,16.51) 107.188,14.478 110.236,11.43 113.792,11.43 114.554,10.668 P5.3
  Bottom Layer w0.203: v1(82.804,30.734) 82.804,30.48 84.074,29.21 91.507,29.21 100.397,20.32 101.6,20.32 105.41,16.51 v1(107.188,16.51)
RF_CS: P5.4 U1.10 | length 32
  Top Layer w0.203: U1.10 96.109,27.432 96.774,27.432 99.06,25.146 v1(99.06,23.876)
  Bottom Layer w0.203: v1(99.06,23.876) 108.966,23.876 109.982,22.86 109.982,10.922 110.744,10.16 P5.4
SCL: P7.3 P8.3 U1.29 | length 42.5
  Top Layer w0.203: P8.3 P7.3 76.962,1.778 75.946,0.762 73.406,0.762 72.898,1.27 72.898,12.192 75.184,14.478 80.01,14.478 81.788,16.256 85.229,16.256 86.817,17.845 86.817,20.403 U1.29
SD_CS: H1.2 U1.19 | length 32.5
  Top Layer w0.203: v1(86.36,30.734) 86.845,30.734 U1.19 ; v1(106.172,29.21) 112.014,29.21 112.84,28.384 H1.2
  Bottom Layer w0.203: v1(86.36,30.734) 97.282,30.734 98.806,29.21 v1(106.172,29.21)
SDA: P7.4 P8.4 U1.30 | length 28.8
  Top Layer w0.203: P7.4 P8.4 74.422,11.684 76.708,13.97 80.264,13.97 82.042,15.748 85.598,15.748 87.884,18.034 87.884,20.339 U1.30
SWCLK: P2.9 U1.24 | length 17.2
  Top Layer w0.254: P2.9 74.584,23.368 77.318,26.102 77.318,26.264 78.486,27.432 84.49,27.432 U1.24
SWDIO: P2.7 U1.23 | length 21.7
  Top Layer w0.254: P2.7 v1(73.66,20.828) ; v1(73.66,24.638) 75.243,24.638 76.886,26.281 76.886,26.848 78.232,28.194 84.859,28.194 U1.23
  Bottom Layer w0.254: v1(73.66,20.828) v1(73.66,24.638)
VBat: BT1.1 C16.1 Q1.3 R18.2 U4.5 U6.3 | length 64.2
  Top Layer w0.254: 100.076,40.64 U6.3
  Top Layer w0.508: BT1.1 C16.1 U4.5 ; Q1.3 96.962,47.564 97.79,46.736 v1(97.79,46.228) 97.79,45.212 99.314,43.688 99.314,41.402 100.076,40.64 ; v1(100.838,35.306) 101.87,36.338 R18.2
  Bottom Layer w0.508: BT1.1 69.088,46.888 71.78,49.581 96.215,49.581 97.79,48.006 v1(97.79,46.228) 97.79,45.569 100.838,42.521 v1(100.838,35.306)
VSup: C11.2 C12.2 C17.2 D1.1 L1.1 Q1.2 R13.2 U3.5 U4.1 U5.1 U5.4 | length 33.9
  Top Layer w0.254: U5.1 81.666,42.838 v1(82.296,42.208) ; U5.4 88.372,46.088 88.392,46.108 ; v1(85.344,48.006) D1.1 C11.2 88.458,46.174 88.392,46.108 ; U3.5 91.624,45.396 92.202,45.974 Q1.2 89.794,46.614 89.288,46.108 88.392,46.108
  Top Layer w0.508: C12.2 75.814,45.204 U4.1 C17.2 R13.2 79.756,44.45 80.518,43.688 U5.1
  Bottom Layer w0.254: v1(82.296,42.208) 82.296,43.18 83.82,44.704 83.82,46.99 84.836,48.006 v1(85.344,48.006)
pads on no net: J1.2 J1.3 J1.MH1 J1.MH2 P2.2 P2.3 P2.5 P2.11 P2.13 P2.17 P2.19 U1.12

## Polygon pours and split planes (outlines as drawn)
3V3 on Top Layer "3V3_L01_P018" (solid, remove dead copper, pour order 18): 81.534,33.782 81.534,34.544 81.534,36.83 84.582,36.83 84.615,36.863 96.741,36.863 97.028,36.576 97.028,36.068 97.028,34.544 93.218,34.544 92.329,33.655
NetL2_1 on Top Layer "NETL2_1_L01_P012" (solid, remove dead copper, pour order 12): 83.566,43.688 82.804,42.926 82.804,40.132 84.328,40.132 84.328,42.926
+5V on Top Layer "+5V_L01_P000" (solid, pour order 0): 102.87,41.275 109.22,41.275 109.855,40.64 111.125,40.64 111.125,39.37 102.235,39.37 102.235,40.64
GND on Top Layer "GND_L01_P013" (solid, remove dead copper, pour order 13): 67.183,0.051 67.183,50.009 116.582,50.009 116.586,50.005 116.586,0.051
VSup on Top Layer "VSUP_L01_P016" (solid, remove dead copper, pour order 16): 83.566,46.088 83.631,46.023 90.297,46.023 90.297,46.609 90.932,47.244 91.084,47.092 92.905,47.092 92.905,43.375 92.71,43.18 89.662,43.18 87.376,45.466 83.566,45.466
+5V on Bottom Layer "+5V_L02_P002" (solid, pour order 2): 102.87,41.275 109.22,41.275 109.855,40.64 111.125,40.64 111.125,39.37 102.235,39.37 102.235,40.64
GND on Bottom Layer "GND_L02_P015" (solid, remove dead copper, pour order 15): 67.183,0.051 67.183,50.009 116.582,50.009 116.586,50.005 116.586,0.051

## Other copper
Multi-Layer:
  pour cut-out: 67.262,50.009 ccw(c68.765,50.007) 70.268,50.005 70.264,50.009
  pour cut-out: 70.246,0.039 ccw(c68.743,0.041) 67.24,0.043 67.244,0.039
  pour cut-out: 110.251,0.051 ccw(c108.748,0.053) 107.245,0.055 107.249,0.051
  pour cut-out: 107.247,49.989 ccw(c108.75,49.987) 110.253,49.985 110.249,49.989

## Silkscreen, mask and mechanical layers (free items; w line width, h text height)
Mechanical 1:
  drawing of 319 lines, arcs and shapes, not listed
Mechanical 3:
  lines w0.013: -3.081,26.373 -1.631,26.373 0.869,26.373 ; 0.869,22.423 0.869,23.873 0.869,26.373 ; 0.869,30.323 0.869,28.873 0.869,26.373 ; 4.819,26.373 3.369,26.373 0.869,26.373 ; 50.619,26.373 52.069,26.373 54.569,26.373 ; 54.569,22.423 54.569,23.873 54.569,26.373 ; 54.569,30.323 54.569,28.873 54.569,26.373 ; 58.519,26.373 57.069,26.373 54.569,26.373 ; 65.219,25.623 65.219,27.123

## Text inside footprints (layer, text, board x,y; h text height)
BT1: Top Overlay "+" at 68.834,47.244 h1.14 r270
P2: Top Overlay "20" at 68.58,37.592 h1.14 r90; Top Overlay "19" at 71.628,37.592 h1.14 r90; Top Overlay "1" at 71.628,11.176 h1.14 r90; Top Overlay "2" at 68.834,11.176 h1.14 r90
P5: Top Overlay "2" at 111.76,5.588 h1.14 r90; Top Overlay "1" at 115.062,5.588 h1.14 r90; Top Overlay "7" at 115.062,16.764 h1.14 r90; Top Overlay "8" at 112.522,16.764 h1.14 r90